# Altium PCB ANT_Miner_CtrlBoard_V1.2.PcbDoc
Units mil, origin at the board's own origin, x right, y up, seen from the top; angles counter-clockwise.
Board outline 5078.74 x 1377.95 mil, 2 copper layers (Top Layer, Bottom Layer); 116 components, 89 nets, 414 pads, 100 vias.
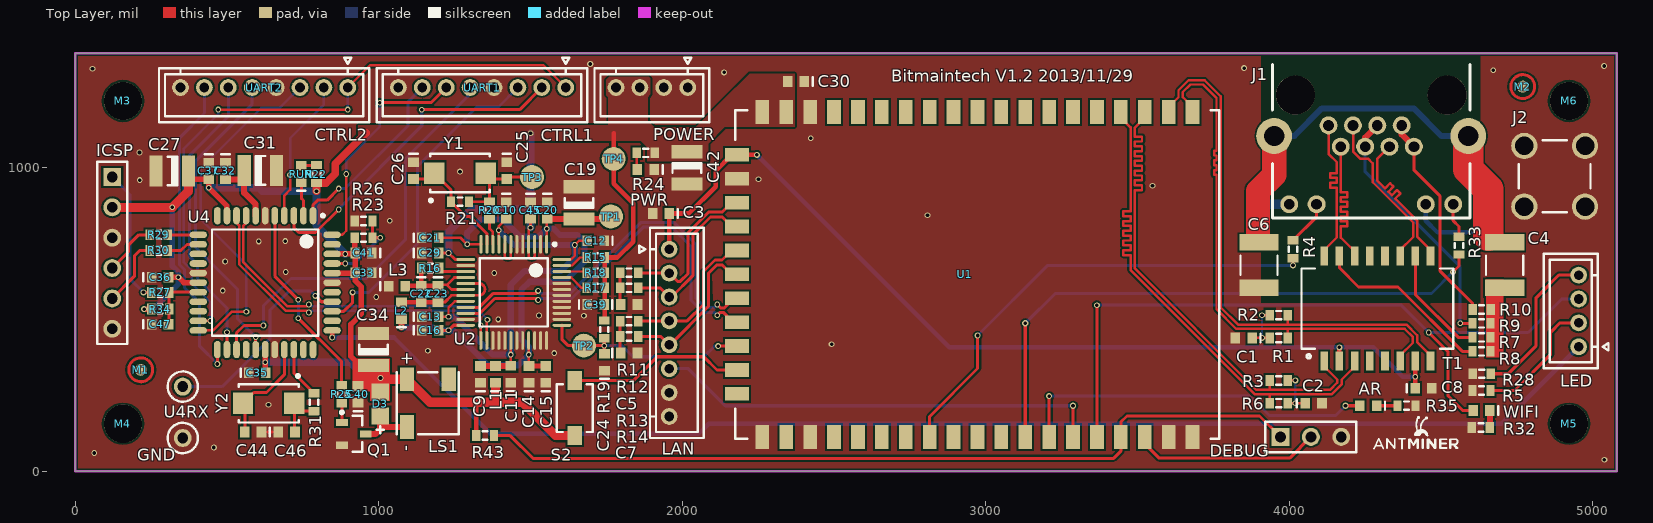
[diagram p0: Top Layer view]
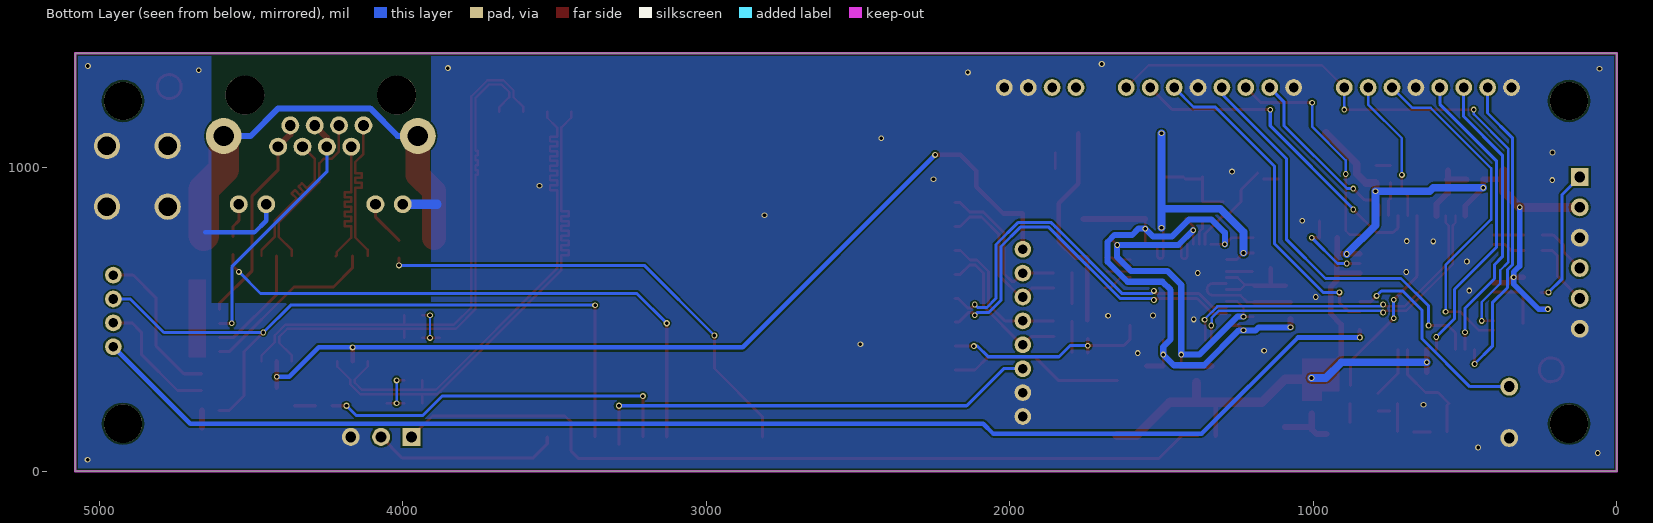
[diagram p1: Bottom Layer view, seen from below]

## Layer stack, top to bottom
Top Layer: signal copper 1.4
Dielectric: core 12.6, FR-4, Dk 4.8
Bottom Layer: signal copper 1.4

## Board outline
5078.74,1377.95 5078.74,0 0,0 0,1377.95

## Design rules (kind name [scope] priority, off if disabled: settings)
Clearance [All] p1: gap=6
DiffPairsRouting [All] p1: maxlimit=6 minlimit=6 mostfreqgap=6 maxuncoupledlength=500
HoleSize [All] p1: absolutevalues=TRUE maxlimit=200 minlimit=1 maxpercent=80.000 minpercent=20.000
MinimumSolderMaskSliver [All] p1: minsoldermaskwidth=1
PolygonConnect [All] p1: connectstyle=Direct reliefconductorwidth=10 reliefentries=4 polygonreliefangle="90 Angle" airgapwidth=10
RoutingVias [All] p1: holewidth=12 width=20 viastyle="Through Hole" minholewidth=12 minwidth=20 maxholewidth=28 maxwidth=50
SilkToSilkClearance [All] p1: silktosilkclearance=1
SilkToSolderMaskClearance SilkscreenOverComponentPads [IsPad] p1: minsilkscreentomaskgap=1 clearancetoexposedcopper=TRUE
SolderMaskExpansion [All] p1: expansion=4
Width Width_VDD [InNet('VDD')] p1: maxlimit=100 minlimit=10 preferedwidth=10
Width Width_GND [InNet('GND')] p2: maxlimit=100 minlimit=8 preferedwidth=15
Width Width_PLL [InNet('VPLL')] p3: maxlimit=50 minlimit=10 preferedwidth=10
Width Width_VCC [InNet('VCC')] p4: maxlimit=50 minlimit=10 preferedwidth=10
Width [All] p5: maxlimit=100 minlimit=8 preferedwidth=8
23 further rules are at their usual default settings.

## Classes and differential pairs
differential pair D1: +D1_P -D1_N
differential pair LAN1_RX: +LAN1_RX_P -LAN1_RX_N
differential pair LAN1_TX: +LAN1_TX_P -LAN1_TX_N
differential pair USB: +USB_P -USB_N
differential pair WAN_RX: +WAN_RX_P -WAN_RX_N
differential pair WAN_TX: +WAN_TX_P -WAN_TX_N
differential pair WANRX: +WANRX_P -WANRX_N
differential pair WANTX: +WANTX_P -WANTX_N

## Components (designator, comment, footprint, x,y, rotation, side; value= is the part's Value field where it differs from the comment)
AR "Green" LED0603(1608) 4259.84,216.54 r180 top
C1 "100nF" CC0603(1608) 3849.92,439.92 r180 top
C2 "100nF" CC0603(1608) 4079.92,224.92 r0 top
C3 "100nF" CC0603(1608) 1929.92,849.92 r180 top
C4 "10nF/2KV" 1812 4708.92,679.92 r270 top
C5 "100nF" CC0603(1608) 1824.92,549.92 r0 top
C6 "10nF/2KV" 1812 3899.92,679.92 r270 top
C7 "100nF" CC0603(1608) 1824.92,389.92 r0 top
C8 "100nF" CC0603(1608) 4441.92,273.92 r0 top
C9 "4.7uF" CC0603(1608) 1334.92,319.92 r90 top
C10 "100nF" CC0603(1608) 1419.92,859.92 r270 top
C11 "100nF" CC0603(1608) 1435.08,320.08 r90 top
C12 "100nF" CC0603(1608) 1714.92,759.92 r180 top
C13 "100nF" CC0603(1608) 1169.92,509.92 r0 top
C14 "4.7uF" CC0603(1608) 1494.92,319.92 r90 top
C15 "100nF" CC0603(1608) 1549.92,319.92 r90 top
C16 "100nF" CC0603(1608) 1169.92,464.92 r0 top
C19 "22uF/10V" CC1210(3225) 1659.92,884.92 r270 top
C20 "4.7uF" CC0603(1608) 1554.92,859.92 r270 top
C21 "100nF" CC0603(1608) 1169.92,769.92 r0 top
C22 "100nF" CC0603(1608) 1139.92,584.92 r270 top
C23 "100nF" CC0603(1608) 1194.92,584.92 r270 top
C24 "4.7uF" CC0603(1608) 1743.92,359.92 r90 top
C25 "22pF" CC0603(1608) 1421.34,990.98 r270 top
C26 "22pF" CC0603(1608) 1114.25,990.98 r270 top
C27 "22uF/10V" CC1210(3225) 319.92,989.92 r0 top
C29 "100nF" CC0603(1608) 1169.92,719.92 r0 top
C30 "100nF" CC0603(1608) 2374.92,1284.92 r180 top
C31 "10uF/10V" CC1210(3225) 609.88,991.93 r180 top
C32 "100nF" CC0603(1608) 494.92,989.92 r270 top
C33 "100nF" CC0603(1608) 949.92,654.92 r180 top
C34 "22uF/10V" CC1210(3225) 982.92,401.92 r270 top
C35 "100nF" CC0603(1608) 599.92,324.92 r0 top
C36 "100nF" CC0603(1608) 279.92,639.92 r0 top
C37 "100nF" CC0603(1608) 439.92,989.92 r270 top
C39 "100nF" CC0603(1608) 1714.92,549.92 r0 top
C40 "100nF" CC0603(1608) 931.92,253.92 r90 top
C41 "100nF" CC0603(1608) 949.92,719.92 r180 top
C42 "22uF/6.3V" CC1210(3225) 2014.92,999.92 r90 top
C44 "22pF" CC0603(1608) 586.26,129.72 r180 top
C45 "100nF" CC0603(1608) 1499.92,859.92 r270 top
C46 "22pF" CC0603(1608) 696.5,129.72 r0 top
C47 "100nF" CC0603(1608) 279.92,484.92 r0 top
D3 "1N4148" DIODE0805 1004.92,182.92 r180 top
DEBUG "HDR1X3" HDR1X3 3970.92,113.92 r0 top
GND "GND" TP_DIP_1.5mm 354.33,110.24 r0 top
ICSP "HDR1X6" HDR1X6 122.05,970.08 r270 top
J1 "WAN" RJ45_2LED_DIP 4269.69,1240.16 r180 top locked
J2 "SMA HOLE" SMA_HOLE 4874.02,972.44 r0 top
L1 "600/100M" INDC1608L 1384.92,319.92 r90 top
L2 "600/100M" INDC1608L 1074.92,529.92 r90 top
L3 "600/100M" INDC1608L 1059.92,609.92 r0 top
LAN "Header 8" 8PIN_180 1956.69,456.69 r270 top locked
LED "Header 4" 4PIN_180 4952.92,528.81 r90 top
LS1 "Bell" YR5025A 1161.92,224.92 r270 top
M1 "MASK" MASK 215.92,334.92 r0 top
M2 "MASK" MASK 4768.92,1267.92 r0 top
M3 "Mount Hole" HOLE_3.2#1 157.48,1220.47 r0 top locked
M4 "Mount Hole" HOLE_3.2#1 157.48,157.48 r0 top locked
M5 "Mount Hole" HOLE_3.2#2 4763.78,157.48 r0 top locked
M6 "Mount Hole" HOLE_3.2#2 4763.78,1220.47 r0 top locked
POWER "Header 4" 4PIN_180 1899.81,1264.92 r180 top locked
PWR "Red" LED0603(1608) 1879.92,994.92 r180 top
Q1 "MMBT3904" SOT23_L 917.92,123.92 r0 top
R1 "49.9ohm/1%" RR0603(1608) 3964.92,439.92 r0 top
R2 "49.9ohm/1%" RR0603(1608) 3964.92,514.92 r0 top
R3 "49.9ohm/1%" RR0603(1608) 3964.92,299.92 r180 top
R4 "270" RR0603(1608) 4011.92,731.92 r90 top
R5 "NC" RR0603(1608) 4632.92,266.92 r180 top
R6 "49.9ohm/1%" RR0603(1608) 3964.92,224.92 r180 top
R7 "75ohm/1%" RR0603(1608) 4632.92,441.92 r0 top
R8 "75ohm/1%" RR0603(1608) 4632.92,395.92 r0 top
R9 "75ohm/1%" RR0603(1608) 4632.92,487.92 r0 top
R10 "75ohm/1%" RR0603(1608) 4633.39,533.92 r0 top
R11 "49.9ohm/1%" RR0603(1608) 1824.92,654.92 r0 top
R12 "49.9ohm/1%" RR0603(1608) 1824.92,604.92 r0 top
R13 "49.9ohm/1%" RR0603(1608) 1824.92,494.92 r0 top
R14 "49.9ohm/1%" RR0603(1608) 1824.92,444.92 r0 top
R15 "10K" RR0603(1608) 1714.92,704.92 r180 top
R16 "2.43K/1%" RR0603(1608) 1169.92,669.92 r0 top
R17 "510" RR0603(1608) 1714.92,604.92 r0 top
R18 "10K" RR0603(1608) 1714.92,654.92 r0 top
R19 "10K" RR0603(1608) 1742.92,467.92 r90 top
R20 "0" RR0603(1608) 1364.92,859.92 r90 top
R21 "1M" RR0603(1608) 1267.8,888.62 r0 top
R22 "1K" RR0603(1608) 794.92,979.92 r270 top
R23 "0" RR0603(1608) 949.92,769.92 r180 top
R24 "1K" RR0603(1608) 1879.92,1049.92 r0 top
R25 "1K" RR0603(1608) 877.92,253.92 r90 top
R26 "NC" RR0603(1608) 949.92,824.92 r0 top
R27 "10" RR0603(1608) 279.92,589.92 r180 top
R28 "NC" RR0603(1608) 4633.92,321.92 r180 top
R29 "10" RR0603(1608) 275.59,779.53 r180 top
R30 "10" RR0603(1608) 275.59,728.35 r180 top
R31 "0" RR0603(1608) 787.05,228.15 r90 top
R32 "1K" RR0603(1608) 4630.95,144.89 r0 top
R33 "270" RR0603(1608) 4559.06,744.09 r90 top
R34 "4.7K" RR0603(1608) 279.92,534.92 r180 top
R35 "1K" RR0603(1608) 4385.83,216.54 r180 top
R43 "4.7K" RR0603(1608) 1350.39,118.11 r180 top
RUN "Green" LED0603(1608) 744.92,979.92 r90 top
S2 "SW-PB" SWITCH_3x4 1645.67,208.66 r0 top
T1 "PM44-11BP" PM44-11BP 4289.92,536.69 r0 top locked
TP1 "TP" TP2 1764.92,839.92 r180 top
TP2 "TP" TP2 1675.92,414.44 r180 top
TP3 "TP" TP2 1504.92,969.92 r270 top
TP4 "TP" TP2 1773.92,1029.92 r0 top
U1 "AR9331_49PIN" AR9331_49PIN 2263.78,107.95 r0 top locked
U2 "μPD720114" TQFP48_L 1444.92,589.92 r270 top locked
U4 "PIC32MX250F128D" TQFP44_L 625.98,622.05 r270 top locked
U4RX "RX" TP_DIP_1.5mm 354.33,279.53 r0 top
UART1 "CTRL1" 8PIN_180 1340.33,1264.92 r180 top locked
UART2 "CTRL2" 8PIN_180 622.51,1264.92 r180 top locked
WIFI "Green" LED0603(1608) 4632.92,200.92 r180 top
Y1 "30MHz" 4SMX 1267.8,983.11 r0 top
Y2 "8M" 4SMX 637.44,224.21 r180 top

## Footprints (in the part's own frame and the unit in brackets; to place one, negate y for a bottom-side part, rotate by r counter-clockwise, add the part's x,y. Pads: shape width x height; smd on the part's side, far side on the other; paste and mask are expansions set on the pad)
4PIN_180 [mm]
  round 1.4 hole 0.8: 1(-3,0) 2(-1,0) 3(1,0) 4(3,0)
  silkscreen extent -4.8,-2.5 4.8,2.9, body extent -5,-1.8 5,3, height 6.1
4SMX [mm]
  rect 1.7x1.8 smd: 1(-2.15,0) 2(2.15,0)
  silkscreen extent -2.57,-2.42 2.5,1.6
8PIN_180 [mm]
  round 1.4 hole 0.8: 1(-7,0) 2(-5,0) 3(-3,0) 4(-1,0) 5(1,0) 6(3,0) 7(5,0) 8(7,0)
  silkscreen extent -8.8,-2.5 8.8,2.9, body extent -9,-1.8 9,3, height 6.1
1812 [mm] "Chip Capacitor, Body 4.5x3.2mm, IPC High Density"
  rect 1.4x3.3 smd: 1(-1.9,0) 2(1.9,0)
  silkscreen extent -0.8,-1.55 0.8,1.55, body extent -2.4,-1.7 2.4,1.7, height 1.4
AR9331_49PIN [mm] "AR9331 49PIN"
  rect 1.143x2 smd: 1(0,0.158) 2(2,0.158) 3(4,0.158) 4(6,0.158) 5(8,0.158) 6(10,0.158) 7(12,0.158) 8(14,0.158) 9(16,0.158) 10(18,0.158) 11(20,0.158) 12(22,0.158) 13(24,0.158) 14(26,0.158) 15(28,0.158) 16(30,0.158) 17(32,0.158) 18(34,0.158) 19(36,0.158) 20(36,27.341) 21(34,27.341) 22(32,27.341) 23(30,27.341) 24(28,27.341) 25(26,27.341) 26(24,27.341) 27(22,27.341) 28(20,27.341) 29(18,27.341) 30(16,27.341) 31(14,27.341) 32(12,27.341) 33(10,27.341) 34(8,27.341) 35(6,27.341) 36(4,27.341) 37(2,27.341) 38(0,27.341)
  rect 2x1.146 smd: 39(-2.11,23.75) 40(-2.11,21.75) 41(-2.11,19.75) 42(-2.11,17.75) 43(-2.11,15.75) 44(-2.11,13.75) 45(-2.11,11.75) 46(-2.11,9.75) 47(-2.11,7.75) 48(-2.11,5.75) 49(-2.11,3.75)
  silkscreen extent -2.25,0 38.25,27.5
CC0603(1608) [mm] "Chip Capacitor, Body 1.6x0.8mm, IPC High Density"
  rect 0.8x0.9 smd: 1(-0.7,0) 2(0.7,0)
  silkscreen extent -1.4,-0.35 -1.4,0.35, body extent -0.87,-0.48 0.87,0.47, height 0.85
CC1210(3225) [mm] "Chip Capacitor, Body 3.2x2.5mm, IPC High Density"
  rect 1.1x2.6 smd: 1(-1.35,0) 2(1.35,0)
  silkscreen extent -0.4,-1.2 0.42,1.2, body extent -1.7,-1.35 1.7,1.35, height 1.35
DIODE0805 [mm]
  rect 1.5x1.4 smd: 1(0,0) 2(0,-2)
  silkscreen extent -0.28,0.88 0.28,1.44, body extent -0.7,-2.07 0.7,0.07, height 0.7
HDR1X3 [mm] "Connector; Header; 3 Position"
  rect 1.5x1.5 hole 0.9: 1(0,0)
  round 1.5 hole 0.9: 2(2.54,0) 3(5.08,0)
  silkscreen extent -1.27,-1.27 6.35,1.27
HDR1X6 [mm] "Connector; Header; 6 Position"
  rect 1.5x1.5 hole 0.9: 1(0,0)
  round 1.5 hole 0.9: 2(2.54,0) 3(5.08,0) 4(7.62,0) 5(10.16,0) 6(12.7,0)
  silkscreen extent -1.27,-1.27 13.97,1.27
HOLE_3.2#1 [mm]
  round 3.2 hole 3.2 unplated: 0(0,0)
HOLE_3.2#2 [mm]
  round 3.2 hole 3.2 unplated: 0(4,0)
INDC1608L [mm] "Chip Inductor, Body 1.6x0.8mm, IPC High Density"
  rect 0.8x0.9 smd: 1(-0.7,0) 2(0.7,0)
  silkscreen extent -1.4,-0.35 -1.4,0.35, body extent -0.87,-0.48 0.87,0.48, height 0.55
LED0603(1608) [mm] "Chip LED, Body 1.6x0.8mm, IPC High Density"
  rect 0.8x0.9 smd: 1(0.7,0) 2(-0.7,0)
  silkscreen extent -1.4,-0.35 -1.4,0.35, body extent -0.87,-0.48 0.87,0.47, height 0.85
MASK [mm] "SMD MASK 1mm"
  round 1 smd: 0(0,0)
  Top Layer circle w0.254: c0,0 r1
PM44-11BP [mm]
  rect 0.64x1.6 smd: 1(-4.445,-4.4) 2(-3.175,-4.4) 3(-1.905,-4.4) 4(-0.635,-4.4) 5(0.635,-4.4) 6(1.905,-4.4) 7(3.175,-4.4) 8(4.445,-4.4) 9(4.445,4.4) 10(3.175,4.4) 11(1.905,4.4) 12(0.635,4.4) 13(-0.635,4.4) 14(-1.905,4.4) 15(-3.175,4.4) 16(-4.445,4.4)
  silkscreen extent -6.35,-4.15 6.35,3.35
RJ45_2LED_DIP [mm]
  round 1.5 hole 0.9: 1(3.57,2.54) 2(2.55,4.32) 3(1.53,2.54) 4(0.51,4.32) 5(-0.51,2.54) 6(-1.53,4.32) 7(-2.55,2.54) 8(-3.57,4.32) 9(6.86,9.14) 10(4.57,9.14) 11(-4.57,9.14) 12(-6.86,9.14)
  round 3 hole 1.7: 13(8.125,3.43) 14(-8.125,3.43)
  round 3.25 hole 3.25: ""(-6.35,0) ""(6.35,0)
  silkscreen extent -8.26,-2.54 8.26,10.29
RR0603(1608) [mm] "Chip Resistor, Body 1.6x0.8mm, IPC High Density"
  rect 0.7x0.9 smd: 1(-0.75,0) 2(0.75,0)
  silkscreen extent -0.2,-0.35 0.2,0.35, body extent -0.85,-0.48 0.85,0.47, height 0.6
SMA_HOLE [mm] "SMA Socket Assembly Hole."
  round 2.2 hole 1.55: 1(-2.54,2.54) 2(2.54,2.54) 3(-2.54,-2.54) 4(2.54,-2.54)
  silkscreen extent -3,-3 3,3
SOT23_L [mm] "SOT23, 3-Leads, Body 2.9x1.3mm, Pitch 0.95mm, Lead Span 2.3mm - Reverse Pinning, IPC High Density"
  rect 1x0.6 smd: 1(-1,0.95) 2(-1,-0.95) 3(1,0)
  silkscreen extent -1.12,-1.5 0.7,1.92, body extent -0.7,-1.5 0.7,1.5, height 1.1
SWITCH_3x4 [mm]
  rect 1.2x1.6 smd: 1(0,2.3) 2(0,-2.3)
  silkscreen extent -1.5,-2 1.5,2
TP2 [mm] "Test Point 2mm SMD"
  round 2 smd: 1(0,0)
TP_DIP_1.5mm [mm]
  round 1.5 hole 0.9: 1(0,0)
  silkscreen extent -1.27,-1.27 1.27,1.27
TQFP44_L [mm] "Thin QFP, 44-Leads, Body 10x10mm, Pitch 0.8mm, IPC High Density"
  oval 1.45x0.55 smd: 1(-5.6,4) 2(-5.6,3.2) 3(-5.6,2.4) 4(-5.6,1.6) 5(-5.6,0.8) 6(-5.6,0) 7(-5.6,-0.8) 8(-5.6,-1.6) 9(-5.6,-2.4) 10(-5.6,-3.2) 11(-5.6,-4) 23(5.6,-4) 24(5.6,-3.2) 25(5.6,-2.4) 26(5.6,-1.6) 27(5.6,-0.8) 28(5.6,0) 29(5.6,0.8) 30(5.6,1.6) 31(5.6,2.4) 32(5.6,3.2) 33(5.6,4)
  oval 0.55x1.45 smd: 12(-4,-5.6) 13(-3.2,-5.6) 14(-2.4,-5.6) 15(-1.6,-5.6) 16(-0.8,-5.6) 17(0,-5.6) 18(0.8,-5.6) 19(1.6,-5.6) 20(2.4,-5.6) 21(3.2,-5.6) 22(4,-5.6) 34(4,5.6) 35(3.2,5.6) 36(2.4,5.6) 37(1.6,5.6) 38(0.8,5.6) 39(0,5.6) 40(-0.8,5.6) 41(-1.6,5.6) 42(-2.4,5.6) 43(-3.2,5.6) 44(-4,5.6)
  silkscreen extent -5.72,-4.45 4.45,4.95, body extent -5,-5 5,5, height 1.6
TQFP48_L [mm]
  oval 1.55x0.25 smd: 1(-4.025,2.75) 2(-4.025,2.25) 3(-4.025,1.75) 4(-4.025,1.25) 5(-4.025,0.75) 6(-4.025,0.25) 7(-4.025,-0.25) 8(-4.025,-0.75) 9(-4.025,-1.25) 10(-4.025,-1.75) 11(-4.025,-2.25) 12(-4.025,-2.75) 25(4.025,-2.75) 26(4.025,-2.25) 27(4.025,-1.75) 28(4.025,-1.25) 29(4.025,-0.75) 30(4.025,-0.25) 31(4.025,0.25) 32(4.025,0.75) 33(4.025,1.25) 34(4.025,1.75) 35(4.025,2.25) 36(4.025,2.75)
  oval 0.25x1.55 smd: 13(-2.75,-4.025) 14(-2.25,-4.025) 15(-1.75,-4.025) 16(-1.25,-4.025) 17(-0.75,-4.025) 18(-0.25,-4.025) 19(0.25,-4.025) 20(0.75,-4.025) 21(1.25,-4.025) 22(1.75,-4.025) 23(2.25,-4.025) 24(2.75,-4.025) 37(2.75,4.025) 38(2.25,4.025) 39(1.75,4.025) 40(1.25,4.025) 41(0.75,4.025) 42(0.25,4.025) 43(-0.25,4.025) 44(-0.75,4.025) 45(-1.25,4.025) 46(-1.75,4.025) 47(-2.25,4.025) 48(-2.75,4.025)
  silkscreen extent -4.15,-2.85 2.85,3.55, body extent -3.5,-3.5 3.5,3.5, height 1.6
YR5025A [mm]
  rect 2x1.2 smd: 1(-2,-1.75) 2(2,-1.75) ""(-2,1.75)
  silkscreen extent -2.6,-2.6 2.6,2.6

## Part data
AR PWR RUN WIFI: library part LED0, "Typical INFRARED GaAs LED"
C1 C2 C3 C4 C5 C6 C7 C8 C9 C10 C11 C12 C13 C14 C15 C16 C19 C20 C21 C22 C23 C24 C25 C26 C27 C29 C30 C31 C32 C33 C34 C35 C36 C37 C39 C40 C41 C42 C44 C45 C46 C47: library part "Cap Semi", "Capacitor (Semiconductor SIM Model)"
D3: library part "Diode 1N4148", "High Conductance Fast Diode"
DEBUG: library part "Header 3", "Header, 3-Pin"
GND U4RX: library part TP
ICSP: library part "Header 6", "Header, 6-Pin"
J1: library part RJ45-DIP, "RJ45,DUAL LED,DIP"
J2: library part SMA_HOLE, "SMA Socket Assembly Hole."
L1 L2 L3: library part Inductor, "Inductor"
LAN: "Header, 8-Pin"
LED POWER: "Header, 4-Pin"
LS1: "Electrical Bell"
M3 M4 M5 M6: library part M_Hole
Q1: "NPN Switching Transistor"
R1 R2 R3 R4 R5 R6 R7 R8 R9 R10 R11 R12 R13 R14 R15 R16 R17 R18 R19 R20 R21 R22 R23 R24 R25 R26 R27 R28 R29 R30 R31 R32 R33 R34 R35 R43: library part Res1, "Resistor"
S2: "Switch"
TP1 TP2 TP3 TP4: library part TP2
U2: library part uPD720114
UART1 UART2: library part "Header 8", "Header, 8-Pin"
Y1 Y2: library part XTAL, "Crystal Oscillator"

## Via types
v1: diameter 19, hole 12, Top Layer to Bottom Layer, 87 vias
v2: diameter 20, hole 12, Top Layer to Bottom Layer, 13 vias

## Nets (pads, with @x,y where several pads share a name; then routed paths per layer and width w, separated by ;. In a path a pad name is that pad's centre, name@x,y a point inside that pad or via, vN(x,y) a via of type N, cw(c..) or ccw(c..) an arc to the next point about the centre after c; other vN are vias at no path point)
AR9331_LED: AR.1 U1.13 | length 1196.6
  Top Layer w10: U1.13 v2(3208.66,248.03) ; v2(4185.04,216.54) AR.1
  Bottom Layer w10: v2(3208.66,248.03) 3870.08,248.03 3933.07,185.04 4153.54,185.04 v2(4185.04,216.54)
AR9331_RX: DEBUG.1 R43.1 U1.16 | length 2764.6
  Top Layer w10: R43.1 1433.07,118.11 1507.87,43.31 3421.26,43.31 3444.89,66.94 U1.16 3444.89,162.89 3464.92,182.92 3901.92,182.92 DEBUG.1
AR9331_TX: DEBUG.2 U1.17 | length 618.8
  Top Layer w10: U1.17 3523.63,91.21 3570.92,43.92 4000.92,43.92 DEBUG.2
BEEP: R25.2 U4.5 | length 650.4
  Top Layer w10: U4.5 657.48,643.36 v1(734.92,565.92) ; v1(734.92,504.92) 877.92,361.92 R25.2
  Bottom Layer w10: v1(734.92,504.92) v1(734.92,565.92)
D1_N: U2.25 U4.9 | length 1110.7
  Top Layer w8: U4.9 531.5,819.35 540.24,810.6 540.24,682.6 692.92,529.92 763.92,529.92 v2(769.92,523.92) ; v1@1334.92,479.92 1336.65,478.19 U2.25
  Bottom Layer w8: v2@769.92,524.92 774.92,529.92 1310.12,529.92 1334.92,505.12 v1@1334.92,479.92
  other v1: 1335.92,480.92
D1_P: U2.26 U4.8 | length 1115.7
  Top Layer w8: U4.8 562.99,818.99 554.24,810.24 554.24,688.6 698.92,543.92 763.92,543.92 v2(769.92,549.92) ; U2.26 v1@1356.34,497.92
  Bottom Layer w8: v2(769.92,549.92) 775.92,543.92 1315.92,543.92 1354.92,504.92 v1@1354.92,494.92
  other v1: 1357.92,499.92
FAN1_SPEED: U4.3 UART1.2 | length 1093
  Top Layer w10: U4.3 720.47,803.37 736.92,786.92 791.92,786.92 v1(867.92,862.92) ; v1(1141.73,1191.92) 1464.18,1191.92 UART1.2
  Bottom Layer w10: v1(867.92,862.92) 867.92,864.92 1141.73,1138.73 v1(1141.73,1191.92)
FAN2_SPEED: U4.4 UART2.2 | length 476.4
  Top Layer w8: U4.4 688.98,908.98 707.92,927.92 v1(707.92,976.92)
  Bottom Layer w8: v1(707.92,976.92) 707.92,1097.92 819.36,1209.36 UART2.2
FAN_PWM: U4.21 UART1.1 UART2.1 | length 2097.3
  Top Layer w8: U4.21 v1(444.96,496.06) ; v1(471.1,1192.1) v1(898.1,1192.1) ; UART2.1 972.1,1338.92 1541.92,1338.92 UART1.1
  Bottom Layer w8: v1(444.96,496.06) 444.96,558.04 384,619 384,662.84 358,688.84 358,1064 471.1,1177.1 v1(471.1,1192.1) ; v1(898.1,1192.1) UART2.1
GND: C1.2 C2.2 C3.2 C5.2 C6.2 C7.2 C8.2 C9.1 C10.1 C11.1 C12.1 C13.1 C14.1 C15.1 C16.1 C19.1 C20.1 C21.1 C24.1 C25.1 C26.1 C27.1 C29.1 C30.1 C31.1 C32.1 C33.1 C34.1 C35.1 C36.1 C37.1 C39.1 C40.1 C41.1 C42.1 C44.1 C45.1 C46.1 C47.1 DEBUG.3 GND.1 ICSP.3 ICSP.6 J1.9 J1.11 J2.1 J2.2 J2.3 J2.4 L3.1 LAN.7 LAN.8 POWER.1 POWER.2 PWR.2 Q1.2 R5.2 R26.1 R28.2 R32.1 R35.1 U1.1 U1.3 U1.18 U1.19 U1.36 U1.40 U2.2 U2.5 U2.6 U2.14 U2.23 U2.27 U2.28 U2.29 U2.31 U2.32 U2.34 U2.35 U2.36 U2.38 U2.39 U2.40 U2.41 U2.42 U2.43 U2.44 U4.6 U4.16 U4.29 U4.39 UART1.4 UART1.8 UART2.4 UART2.8 | length 438.5
  Top Layer w9: C44.1 C46.1
  Bottom Layer w15: J1.11 4449.61,825.98 4488.19,787.4 4649.61,787.4
  Bottom Layer w30: 3886.53,880.32 J1.9
  other v1: 5037.92,38.92 62.92,60.92 636.92,219.92 1577.92,389.92 1161.92,397.92 2491.92,418.92 1393.92,500.92 1675.92,512.92 1527.92,513.92 991.92,574.92 485.92,595.92 1380.92,653.92 693.92,656.92 493.92,691.92 604.92,757.92 691.92,758.92 1035.92,825.92 2807.92,843.92 3548.92,940.92 212.92,959.92 2250.92,962.92 1267.92,987.92 211.92,1050.92 2422.92,1097.92 4671.92,1321.92 56.92,1326.92 3850.92,1328.92 5036.92,1335.92
  other v2: 456.69,78.74 2137.8,1314.96 1696.85,1342.52
HUB_CLK: C25.2 R20.2 R21.2 TP3.1 Y1.2 | length 274.3
  Top Layer w9: R21.2 R20.2@1364.09,888.62 ; R20.2 Y1.2@1364.92,970.63 ; Y1.2@1372.13,963.43 C25.2 ; C25.2@1427.83,969.92 TP3.1
HUB_RST: C24.2 R19.1 TP2.1 U1.47 U2.37 | length 709.6
  Top Layer w10: U2.37 1603.39,435.46 1624.41,414.44 v1(1742.92,414.44) ; C24.2@1742.92,390.48 R19.1 ; v1(2118.07,413.07) U1.47
  Bottom Layer w10: v1(1742.92,414.44) 1801.41,414.44 1837.92,377.92 2070.92,377.92 2105.92,412.92 v1@2117.92,412.92
LAN1_LED: LAN.6 U1.14 | length 1508.4
  Top Layer w10: U1.14@3287.4,89.4 U1.14 v2(3287.4,216.54)
  Bottom Layer w10: LAN.6 2019.69,338.58 2141.73,216.54 v2(3287.4,216.54)
LAN1_RX_N: LAN.3 R12.2 U1.42 | length 539.9
  Top Layer w10: R12.2 1926.57,604.92 LAN.3 1964.8,574.8 2034.92,644.92 2034.92,779.92 2093.14,838.14 2131.7,838.14 2163.07,806.77 U1.42
LAN1_RX_P: LAN.2 R11.2 U1.41 | length 522.7
  Top Layer w10: R11.2@1855.83,653.54 LAN.2 1984,626.24 1993.61,626.24 2018.92,651.55 2018.92,786.55 2086.52,854.14 2131.14,854.14 2162.51,885.51 U1.41
LAN1_TX_N: LAN.5 R14.2 U1.44 | length 523.6
  Top Layer w10: R14.2 1929.09,444.92 LAN.5 1959.95,417.32 2085.92,543.29 2085.92,652.29 2114.29,680.66 2131.18,680.66 2162.55,649.29 U1.44
LAN1_TX_P: LAN.4 R13.2 U1.43 | length 485.1
  Top Layer w10: R13.2@1855.59,496.06 LAN.4 2016.06,496.06 2069.92,549.92 2069.92,658.92 2107.66,696.66 2130.66,696.66 2162.03,728.03 U1.43
LED: RUN.2 U4.2 | length 112.8
  Top Layer w10: RUN.2 744.92,899.92 751.97,892.87 U4.2
LED2: LED.1 U4.34 | length 4379.1
  Top Layer w15: v1(846.46,441.39) U4.34
  Bottom Layer w15: v1(846.46,441.39) 1050.46,441.39 1366.92,124.92 2054.92,124.92 2087.48,157.48 4699.7,157.48 LED.1
NET_POW: C3.1 C8.1 LAN.1 T1.2 T1.7 U1.39 | length 3119.9
  Top Layer w15: LAN.1 C3.1@1956.69,849.13 ; C3.1 2021.92,849.92 2109.92,937.92 2109.92,989.92 2162.99,1042.99 U1.39 v1(2245.85,1042.99) ; T1.2 v2(4164.92,408.92) ; C8.1@4414.92,276.48 v1(4414.92,311.92) T1.7
  Bottom Layer w15: v1@2245.92,1042.92 2879.92,408.92 v2(4164.92,408.92) 4276.92,408.92 4373.92,311.92 v1(4414.92,311.92)
NetAR_2: AR.2 R35.2 | length 68.9
  Top Layer w10: AR.2 R35.2
NetC1_1: C1.1 R1.1 R2.1 | length 159.8
  Top Layer w8: C1.1 3906.44,439.92 R1.1 ; v1(3909.92,514.92) R2.1
  Bottom Layer w8: v1@3906.44,511.44 v1(3909.92,514.92) ; v1(3909.92,439.92) v1@3909.92,511.44
NetC2_1: C2.1 R3.1 R6.1 | length 158.4
  Top Layer w8: R6.1 C2.1 ; R3.1 v1(4019.92,299.92)
  Bottom Layer w8: v1(4019.92,224.92) v1(4019.92,299.92)
NetC4_1: C4.1 C6.1 J1.13 J1.14 | length 1427.4
  Top Layer w80: C6.1@3896.92,769.92 3896.92,923.92 3949.8,976.8 J1.13
  Top Layer w100: J1.14 4589.57,995.28 4654.92,929.92 C4.1@4654.92,776.92
  Bottom Layer w20: J1.13 4016.12,1105.12 4106.92,1195.92 4409.92,1195.92 4500.72,1105.12 J1.14
NetC4_2: C4.2 R7.2 R8.2 R9.2 R10.2
NetC5_1: C5.1 R11.1 R12.1 | length 108
  Top Layer w10: C5.1@1795.39,551.89 R12.1 ; R12.1@1795.39,599.92 R11.1
NetC7_1: C7.1 R13.1 R14.1 | length 103
  Top Layer w10: C7.1@1795.39,391.89 R14.1 R13.1
NetC22_1: C22.1 C23.1 L3.2 R16.1 U2.16 U2.18 | length 328.8
  Top Layer w9: C23.1@1197.36,614.92 1224.92,614.92 ; U2.18 1240.08,599.76 1224.92,614.92 ; U2.16 1249.13,639.13 1224.92,614.92
  Top Layer w15: L3.2@1090.04,612.48 C22.1 ; R16.1@1139.92,669.45 C22.1 ; C23.1 C22.1
NetC22_2: C22.2 C23.2 L2.2 U2.17 U2.19 | length 370.3
  Top Layer w9: C23.2 1217.36,557.36 1240.08,580.08 U2.19 1330.08,580.08 ccw(c1330.08,599.92) 1349.92,599.92 ccw(c1330.39,599.92) 1330.39,619.45 U2.17
  Top Layer w15: L2.2@1074.92,557.36 C22.2 C23.2
NetC26_2: C26.2 R21.1 U2.11 Y1.1 | length 363.3
  Top Layer w10: C26.2 Y1.1@1163.46,963.43 ; Y1.1 1238.27,927.99 R21.1 1286.97,839.92 1299.92,839.92 1356.34,783.5 U2.11
NetC44_2: C44.2 U4.30 Y2.2 | length 346.6
  Top Layer w10: Y2.2 588.5,259.92 629.92,259.92 688.98,318.98 U4.30 ; C44.2 Y2.2@558.7,218.31
NetC46_2: C46.2 R31.1 Y2.1 | length 131.9
  Top Layer w10: C46.2@722.09,131.69 Y2.1 ; Y2.1@747.68,198.62 R31.1
NetD3_1: D3.1 LS1.2 Q1.3 | length 193.9
  Top Layer w20: Q1.3 989.92,123.92 1004.92,138.92 D3.1@1004.92,190.92 ; 1004.92,146.18 LS1.2
NetICSP_1: ICSP.1 R27.2 | length 448.2
  Top Layer w10: v1(224.92,589.92) R27.2
  Bottom Layer w10: ICSP.1 179.92,912.2 179.92,634.92 v1(224.92,589.92)
NetICSP_4: ICSP.4 R29.2 | length 182.2
  Top Layer w10: ICSP.4 174.92,722.95 174.92,744.92 209.53,779.53 R29.2
NetICSP_5: ICSP.5 R30.2 | length 228.8
  Top Layer w10: ICSP.5 194.92,642.95 194.92,709.92 213.35,728.35 R30.2
NetJ1_4: J1.4 J1.5 R9.1 | length 839.3
  Top Layer w10: v1(4562.63,487.92) R9.1
  Top Layer w20: J1.4 4249.61,1100 J1.5
  Bottom Layer w10: J1.4 4249.61,987.28 4562.63,674.25 v1(4562.63,487.92)
NetJ1_7: J1.7 J1.8 R10.1 | length 703.1
  Top Layer w10: J1.8 4410.24,993.61 4495.92,907.92 4495.92,661.56 4603.87,553.61 R10.1
  Top Layer w20: J1.7 4370.08,1110.24 J1.8
NetJ1_10: J1.10 R4.2 | length 151.1
  Top Layer w10: R4.2 4089.76,839.29 J1.10
NetJ1_12: J1.12 R33.2 | length 114.7
  Top Layer w10: J1.12 4539.76,826.38 4559.06,807.09 R33.2
NetLED_2: LED.2 R5.1 | length 425.4
  Top Layer w10: R5.1 4741.92,266.92 4860.92,385.92 4860.92,458.92 4891.44,489.44 LED.2
NetLED_4: LED.4 R28.1 | length 516.6
  Top Layer w10: R28.1 4720.92,321.92 4811.92,412.92 4811.92,570.92 4887.92,646.92 LED.4
NetPWR_1: PWR.1 R24.1 | length 53
  Top Layer w8: PWR.1@1850.39,996.89 R24.1
NetQ1_1: Q1.1 R25.1 | length 63.1
  Top Layer w10: Q1.1 R25.1@878.55,224.39
NetR7_1: R7.1 T1.10 | length 373.9
  Top Layer w10: T1.10 4414.92,582.92 4555.92,441.92 R7.1
NetR8_1: R8.1 T1.15 | length 591.4
  Top Layer w10: T1.15 4164.92,670.92 4227.92,607.92 4357.92,607.92 4569.92,395.92 R8.1
NetR15_2: R15.2 U2.47 | length 93
  Top Layer w8: U2.47 1636.97,678.5 1663.39,704.92 R15.2
NetR16_2: R16.2 U2.15 | length 85.9
  Top Layer w9: R16.2@1200.55,658.82 U2.15
NetR17_1: R17.1 U2.45 | length 96.2
  Top Layer w8: U2.45 1634.37,639.13 1668.58,604.92 R17.1
NetR18_1: R18.1 U2.46 | length 76.8
  Top Layer w8: U2.46 R18.1@1680.16,658.82
NetR20_1: R20.1 U2.10 | length 86.6
  Top Layer w9: R20.1 1364.92,799.92 1376.02,788.82 U2.10
NetR22_1: R22.1 RUN.1 | length 48
  Top Layer w10: RUN.1 R22.1@792.95,1007.48
NetR31_2: R31.2 U4.31 | length 171.5
  Top Layer w10: U4.31 720.47,324.25 R31.2
NetR32_2: R32.2 WIFI.2 | length 56
  Top Layer w20: R32.2 WIFI.2
NetS2_1: S2.1 U1.48 | length 585.7
  Top Layer w10: S2.1 1838.58,299.21 1917.32,377.95 2070.87,377.95 2114.49,334.33 U1.48
NetU2_7: U2.7 U2.8 | length 106.9
  Top Layer w8: U2.8 1415.39,709.92 ccw(c1424.39,709.92) 1424.39,700.92 1426.08,700.92 ccw(c1426.08,709.92) 1435.08,709.92 U2.7
PGEC: R30.1 U4.13 | length 108.5
  Top Layer w10: R30.1 348.35,728.35 368.03,748.03 U4.13
PGED: R29.1 U4.12 | length 100.4
  Top Layer w10: R29.1 U4.12
PIC_RESET: C47.2 R27.1 R34.1 U4.18 | length 199.4
  Top Layer w10: C47.2@309.45,486.89 R34.1 R27.1 310.08,590.55 U4.18
TEMP_SCL1: U4.44 UART1.6 | length 759
  Top Layer w8: U4.44 879.53,779.53 892.92,792.92 v1(892.92,979.92)
  Top Layer w10: v1(1003.92,1214.92) 1172.22,1214.92 UART1.6
  Bottom Layer w8: v1(892.92,979.92) 892.92,1024.92 1003.92,1135.92 v1(1003.92,1214.92)
TEMP_SCL2: U4.24 UART2.6 | length 967.1
  Top Layer w10: U4.24 v1(500,459)
  Bottom Layer w10: v1(500,459) 500,538 403,635 403,681 377,707 377,1042 504.4,1169.4 UART2.6
TEMP_SDA1: U4.1 UART1.7 | length 602
  Top Layer w10: U4.1 783.46,878.46 798.92,893.92 829.92,893.92 v1(867.92,931.92)
  Bottom Layer w10: v1(867.92,931.92) 888.92,931.92 1096.92,1139.92 1096.92,1218.36 UART1.7
TEMP_SDA2: U4.23 UART2.7 | length 1044.7
  Top Layer w10: v1(468.5,354) U4.23
  Bottom Layer w10: UART2.7 425.66,1180.66 343,1098 343,682.13 360.42,664.71 360.42,605.58 410,556 410,412.5 v1(468.5,354)
U1RX: U4.36 UART1.3 | length 1086.6
  Top Layer w10: U4.36 884.56,527.56 913.92,556.92 v1(913.92,589.92)
  Bottom Layer w10: v1(913.92,589.92) 967.78,589.92 1127.92,750.06 1127.92,1005.92 1322.92,1200.92 1394.44,1200.92 UART1.3
U1TX: U4.25 UART1.5 | length 1365.5
  Top Layer w10: U4.25 531.5,456.5 555.92,480.92 v2(619.92,480.92)
  Bottom Layer w10: v2(619.92,480.92) 619.92,545.12 710.72,635.92 959.92,635.92 1088.92,764.92 1088.92,1030.92 1300.96,1242.96 UART1.5
U2RX: U4.22 UART2.3 | length 1155.8
  Top Layer w8: U4.22 453.57,464.57 514.92,525.92 v1(563.92,525.92)
  Bottom Layer w8: v1(563.92,525.92) 563.92,679.92 414,829.84 414,999 612.92,1197.92 673.62,1197.92 UART2.3
U2TX: U4.27 UART2.5 | length 1022.4
  Top Layer w10: U4.27 v1@594.49,442.92
  Bottom Layer w10: UART2.5 583.14,1210.14 397,1024 397,737.84 534.92,599.92 534.92,502.92 v1(594.92,442.92)
U3RX: U4.43
U3TX: U4.38
U4RX: U4.37 U4RX.1 | length 692.6
  Top Layer w10: v2(791.34,578.74) 811.02,559.06 U4.37
  Bottom Layer w10: U4RX.1 484.25,279.53 641.73,437.01 641.73,531.5 704.72,594.49 775.59,594.49 v2(791.34,578.74)
U4TX: U4.33
USB_ID: R23.1 R26.2 U4.41 | length 274.1
  Top Layer w10: U4.41 v1(889.8,685.04) ; R26.2 R23.1 v1(1004.92,769.92)
  Bottom Layer w10: v1(889.8,685.04) 920.04,685.04 v1(1004.92,769.92)
USB_N: U1.45 U2.21 | length 1264.9
  Top Layer w10: U2.21 1330.71,540.71 1375.92,585.92 1515.92,585.92 v1(1524.92,594.92) ; v1(2114.92,549.92) 2125.66,539.18 2139.18,539.18 2170.55,570.55 U1.45
  Bottom Layer w8: 1849.92,804.92 1854.02,809.02
  Bottom Layer w10: v1(1524.92,594.92) 1533.92,585.92 1629.51,585.92 1849.51,805.92 1864.51,820.92 1971.55,820.92 2044.92,747.55 2044.92,570.42 2074.92,540.42 2105.42,540.42 v1(2114.92,549.92)
USB_P: U1.46 U2.22 | length 1256.3
  Top Layer w10: U2.22 1333.65,521.02 1382.55,569.92 1519.92,569.92 v1(1524.92,564.92) ; v1(2114.92,514.92) 2123.18,523.18 2136.66,523.18 2168.03,491.81 U1.46
  Bottom Layer w10: v1(1524.92,564.92) 1529.92,569.92 1636.13,569.92 1856.13,789.92 1871.13,804.92 1964.92,804.92 2028.92,740.92 2028.92,563.79 2068.29,524.42 2105.42,524.42 v1(2114.92,514.92)
VCAP: C31.2 C32.2 U4.7 | length 230
  Top Layer w20: C32.2 C31.2@556.73,962.36 ; C31.2 C31.2@556.73,962.36 ; C31.2@559.92,962.36 C31.2@556.73,962.36 ; U4.7 594.49,880.35 556.73,918.11 C31.2@556.73,962.36
VDD2V5_1: C14.2 C15.2 C16.2 C19.2 C20.2 C21.2 L2.1 TP1.1 U2.1 U2.12 U2.24 U2.33 | length 2207.9
  Top Layer w9: C21.2 1269.92,769.92 v1(1291.46,748.39) U2.12 ; C14.2@1494.13,348.27 v1(1494.13,384.92) U2.33 ; U2.1 v1(1553.19,799.92) C20.2@1553.19,830.63
  Top Layer w10: C16.2 v1(1229.92,464.92) 1246.65,481.65 U2.24
  Top Layer w15: C14.2 C15.2
  Top Layer w20: v1(1074.92,474.92) L2.1 ; C20.2 C19.2@1659.33,832.36 ; C19.2 TP1.1@1756.77,831.77
  Bottom Layer w20: v1(1074.92,474.92) 1179.92,474.92 1189.92,464.92 v1(1229.92,464.92) 1244.92,464.92 1359.92,349.92 1459.13,349.92 v1(1494.13,384.92) 1494.13,410.71 1469.92,434.92 1469.92,597.92 1496.92,624.92 1611.92,624.92 1677.92,690.92 1677.92,755.92 1654.92,778.92 1596.92,778.92 1575.92,799.92 v1(1553.19,799.92) 1527.19,773.92 1465.92,773.92 1409.92,829.92 1334.92,829.92 1291.46,786.46 v1(1291.46,748.39)
VDD3V3: C27.2 C29.2 C30.2 C33.2 C34.2 C35.2 C36.2 C37.2 C39.2 C40.2 C41.2 C42.2 C45.2 D3.2 ICSP.2 L1.1 LS1.1 POWER.3 POWER.4 R15.1 R17.2 R18.2 R19.2 R22.2 R23.2 R24.2 R34.2 R43.2 S2.2 TP4.1 U1.37 U1.38 U2.3 U2.4 U2.13 U4.10 U4.17 U4.28 U4.40 U4.42 | length 5766.6
  Top Layer w9: C45.2 v1(1499.92,802.92) 1494.13,797.13 U2.4 1494.13,709.92 ccw(c1502.13,709.92) 1502.13,701.92 1505.82,701.92 ccw(c1505.82,709.92) 1513.82,709.92 U2.3
  Top Layer w10: C29.2 v1(1229.92,719.92) 1251.65,698.19 U2.13
  Top Layer w15: R43.2 1320.87,225.95 ; R19.2@1744.45,497.45 R15.1 1785.92,704.92 1837.92,756.92 1837.92,883.92 1773.92,947.92 TP4.1 1773.92,1114.92
  Top Layer w18: v1(226.92,534.92) R34.2 ; C36.2 v1(339.92,639.92) 357.8,622.05 U4.17 ; C27.2@384.92,962.36 C37.2 v1(439.92,934.92) 500,874.84 U4.10 ; C35.2@625.98,326.42 U4.28 ; U4.40 C33.2@920.98,653.54 ; U4.42 v1(889.92,716.54) C41.2@918.98,716.54 ; C41.2@920.39,721.89 R23.2 ; C41.2 C33.2 922.36,628.48 942.92,607.92 942.92,519.92 907.92,484.92 907.92,378.92 C34.2@946.07,340.77
  Top Layer w25: v1(794.92,922.92) R22.2 826.39,950.39 856.92,980.92 856.92,1013.92 957.92,1114.92 ; C40.2 931.92,326.62 C34.2@946.07,340.77
  Top Layer w30: ICSP.2 v1(320.08,870.08) 373.07,923.07 C27.2 ; D3.2@1004.92,269.66 v1@1004.92,303.66 ; C34.2@1004.92,352.92 v1@1004.92,303.66 ; 1384.92,228.83 L1.1 ; S2.2 1582.68,118.11 1472.87,227.92 1384.92,227.92 1168.76,227.92 LS1.1 v1@1004.92,303.66
  Bottom Layer w18: v1(226.92,534.92) 257.92,534.92 339.92,616.92 v1(339.92,639.92) 339.92,656.92 320.08,676.76 v1(320.08,870.08)
  Bottom Layer w25: v1(439.92,934.92) 603.92,934.92 615.92,922.92 v1(794.92,922.92) 794.92,811.54 v1(889.92,716.54) ; v1(625.92,359.92) 906.92,359.92 958.92,307.92 v1(1005.92,307.92) ; v1(1229.92,719.92) 1229.92,788.92 1306.92,865.92 1499.92,865.92 ; v1(1499.92,802.92) 1499.92,865.92 ; v1(1499.92,1113.92) 1499.92,865.92
VDD33_1: C9.2 C10.2 C11.2 C12.2 C13.2 L1.2 U2.9 U2.20 U2.30 U2.48 | length 1576.5
  Top Layer w8: C13.2 v1(1229.92,509.92) 1229.92,539.92 1250.39,560.39 U2.20 ; U2.9 v1(1395.71,794.92) 1395.71,808.15 C10.2 ; C11.2 U2.30 ; U2.48 1633.35,698.19 1645.98,710.83 v1(1645.98,745.98) 1659.92,759.92 C12.2@1682.36,759.92
  Top Layer w20: C9.2 L1.2 ; L1.2@1385.08,347.64 C11.2
  Bottom Layer w20: v1(1229.92,509.92) 1249.92,509.92 1374.92,384.92 v1(1434.92,384.92) 1434.92,614.92 1479.92,659.92 1599.92,659.92 1645.98,705.98 v1(1645.98,745.98) 1444.65,745.98 v1(1395.71,794.92)
WAN_LED1: R4.1 U1.8 | length 1557.3
  Top Layer w10: U1.8 2814.96,180.96 2972.92,338.92 v1(2972.92,447.92) ; v1(4011.92,678.92) R4.1
  Bottom Layer w10: v1(2972.92,447.92) 3203.92,678.92 v1(4011.92,678.92)
WAN_LED2: R33.1 U1.12 | length 1918.8
  Top Layer w10: U1.12 v2(3129.92,488.19) ; v2(4539.37,657.48) 4559.06,677.17 R33.1
  Bottom Layer w10: v2(3129.92,488.19) 3228.35,586.61 4468.5,586.61 v2(4539.37,657.48)
WAN_RX_N: R2.2 T1.8 U1.21 | length 1774.4
  Top Layer w8: U1.21 3602.37,1200.37 3634.74,1232.74 3634.74,1255.72 3667.94,1288.92 3720.72,1288.92 3773.92,1235.72 3773.92,540.72 3830.72,483.92 3994.92,483.92 ; R2.2@3994.92,514.92 3994.92,483.92 ; T1.8 4464.92,381.92 4420.92,425.92 4420.92,448.92 4385.92,483.92 3994.92,483.92
WAN_RX_P: R1.2 T1.6 U1.20 | length 1773.7
  Top Layer w8: U1.20 3681.11,1200.73 3648.74,1233.1 3648.74,1249.92 3673.74,1274.92 3714.92,1274.92 3759.92,1229.92 3759.92,1080.92 3759.92,1072.92 3759.92,1056.92 3751.92,1056.92 3751.92,1040.92 3759.92,1040.92 3759.92,1024.92 3751.92,1024.92 3751.92,1008.92 3759.92,1008.92 3759.92,992.92 3751.92,992.92 3751.92,976.92 3759.92,976.92 3759.92,960.92 3759.92,948.92 3759.92,534.92 3824.92,469.92 3994.92,469.92 ; R1.2@3994.92,440.39 3994.92,469.92 ; T1.6 4364.92,381.92 4406.92,423.92 4406.92,443.12 4380.12,469.92 3994.92,469.92
WAN_TX_N: R6.2 T1.3 U1.23 | length 1774.4
  Top Layer w8: U1.23 3444.89,1165.35 3476.92,1133.32 3476.92,880.92 3476.92,856.92 3453.05,856.92 3453.05,840.92 3476.92,840.92 3476.92,824.92 3453.05,824.92 3453.05,808.92 3476.92,808.92 3476.92,792.92 3453.05,792.92 3453.05,776.92 3476.92,776.92 3476.92,760.92 3453.05,760.92 3453.05,744.92 3476.92,744.92 3476.92,728.92 3453.05,728.92 3453.05,712.92 3476.92,712.92 3476.92,704.92 3476.92,663.12 3885.12,254.92 3934.92,254.92 ; R6.2@3934.92,225.39 3934.92,254.92 ; T1.3 4214.92,344.92 4171.92,301.92 4171.92,286.92 4139.92,254.92 3934.92,254.92
WAN_TX_P: R3.2 T1.1 U1.22 | length 1774.4
  Top Layer w8: U1.22 3523.63,1165.36 3490.92,1132.65 3490.92,1110.92 3490.92,1102.92 3514.61,1102.92 3514.61,1086.92 3490.92,1086.92 3490.92,1070.92 3514.61,1070.92 3514.61,1054.92 3490.92,1054.92 3490.92,1038.92 3514.61,1038.92 3514.61,1022.92 3490.92,1022.92 3490.92,1006.92 3514.61,1006.92 3514.61,990.92 3490.92,990.92 3490.92,974.92 3514.61,974.92 3514.61,958.92 3490.92,958.92 3490.92,942.92 3514.61,942.92 3514.61,926.92 3490.92,926.92 3490.92,903.92 3490.92,668.92 3890.92,268.92 ; 3891.39,268.92 4134.12,268.92 4157.92,292.72 4157.92,302.92 4114.92,345.92 T1.1 ; 3935.39,269.39 R3.2
WANRX_N: J1.6 T1.9 | length 545.5
  Top Layer w8: J1.6 4288.92,1029.08 4288.92,958.72 4309.32,938.32 4314.98,932.66 4331.86,949.54 4343.17,938.23 4326.29,921.35 4337.61,910.04 4354.48,926.92 4365.8,915.6 4348.92,898.72 4350.82,896.82 4421.92,825.72 4421.92,772.92 4464.92,729.92 T1.9
WANRX_P: J1.3 T1.11 | length 545.5
  Top Layer w8: J1.3 4210.08,1139.53 4210.08,1053.71 4233.23,1030.55 4259.29,1030.55 4274.92,1014.92 4274.92,952.92 4407.92,819.92 4407.92,772.92 4364.92,729.92 T1.11
WANTX_N: J1.2 T1.14 | length 545.5
  Top Layer w8: J1.2 4169.29,1025.35 4169.92,1024.72 4169.92,927.92 4169.92,919.92 4190.29,919.92 4190.29,903.92 4169.92,903.92 4169.92,887.92 4190.29,887.92 4190.29,871.92 4169.92,871.92 4169.92,855.92 4190.29,855.92 4190.29,839.92 4169.92,839.92 4169.92,823.92 4190.29,823.92 4190.29,807.92 4169.92,807.92 4169.92,795.92 4169.92,769.92 4216.97,722.87 4216.97,711.97 T1.14@4220.28,708.66
WANTX_P: J1.1 T1.16 | length 545.5
  Top Layer w8: T1.16 4114.92,729.92 4155.92,770.92 4155.92,926.92 4155.92,934.92 4134.12,934.92 4134.12,950.92 4155.92,950.92 4155.92,966.92 4134.12,966.92 4134.12,982.92 4155.92,982.92 4155.92,998.92 4155.92,1006.92 4155.92,1018.92 4129.13,1045.71 J1.1
WIFI_LED: LED.3 U1.15 WIFI.1 | length 2441.8
  Top Layer w10: U1.15 v1@3366.14,548.14 ; v1(4458.92,457.92) 4521.92,394.92 4521.92,249.92 4570.92,200.92 WIFI.1
  Bottom Layer w10: v1(3365.92,547.92) 4368.92,547.92 v1(4458.92,457.92) 4786.92,457.92 4897.18,568.18 LED.3
pads on no net: J1. LS1. M1.0 M2.0 M3.0 M4.0 M5.0 M6.0 T1.4 T1.5 T1.12 T1.13 U1.2 U1.4 U1.5 U1.6 U1.7 U1.9 U1.10 U1.11 U1.24 U1.25 U1.26 U1.27 U1.28 U1.29 U1.30 U1.31 U1.32 U1.33 U1.34 U1.35 U1.49 U4.11 U4.14 U4.15 U4.19 U4.20 U4.26 U4.32 U4.35

## Polygon pours and split planes (outlines as drawn)
GND on Top Layer "GND1" (solid, pour order 11): 0,0 0,1377.95 5078.74,1377.95 5078.74,0
VDD3V3 on Top Layer "GND1" (solid, pour order 7): 2369.92,1310.92 2369.92,1134.92 2139.92,1134.92 2084.92,1079.92 2084.92,1021.92 1884.92,1021.92 1884.92,1067.92 1862.92,1089.92 952.92,1089.92 932.92,1109.92 932.92,1139.92 1756.92,1139.92 1756.92,1232.92 1749.92,1239.92 1749.92,1289.92 1759.92,1299.92 1889.92,1299.92 1894.92,1294.92 1894.92,1241.92 1885.92,1232.92 1885.92,1155.92 1907.92,1133.92 2044.92,1133.92 2129.92,1218.92 2221.92,1310.92 2369.92,1310.92
GND on Bottom Layer "GND1" (solid, pour order 9): 0,1377.95 5078.74,1377.95 5078.74,0 0,0

## Keep-outs
Keep-Out Layer:
  the board outline again, w8

## Other copper
Top Layer:
  rectangle net NetC4_2: 4647.92,375.92 4705.92,632.92
  rectangle net VDD3V3: 970.92,232.92 1036.92,371.92
  rectangle net VDD3V3: 912.92,262.92 970.92,371.92
  pour cut-out: 3904.92,1377.95 3904.92,554.92 4629.92,554.92 4629.92,1377.95
Bottom Layer:
  pour cut-out: 3904.92,1377.95 3904.92,554.92 4629.92,554.92 4629.92,1377.95

## Silkscreen, mask and mechanical layers (free items; w line width, h text height)
Top Overlay:
  circle w6: c4452.02,175.92 r2.24
  circle w6: c4425.26,177.92 r2.24
  lines w6: 4279.26,75.92 4294.26,107.92 4309.26,75.92 ; 4283.48,84.92 4305.04,84.92 ; 4321.26,76.92 4321.26,107.92 4347.26,76.92 4347.26,107.92 ; 4360.26,107.92 4381.26,107.92 ; 4371.26,75.92 4371.26,107.92 ; 4416.26,124.92 4431.26,124.92 ; 4420.26,102.92 4409.26,86.92 4396.26,105.92 4396.26,76.92 4394.26,76.92 4394.26,105.92 4399.26,105.92 4408.26,88.92 4420.26,105.92 4424.26,105.92 4424.26,76.92 4422.26,76.92 4422.26,105.92 ; 4420.26,129.92 4444.26,130.92 4428.26,132.92 ; 4421.47,135.84 cw(c4468.26,153.92) 4422.26,173.92 ; 4432.73,140.59 cw(c4471.26,142.92) 4450.54,175.49 ; 4456.26,105.92 4479.26,76.92 ; 4458.26,105.92 4458.26,76.92 4455.26,76.92 4455.26,105.92 4459.26,105.92 4478.26,81.92 ; 4495.26,77.92 4517.26,77.92 4517.26,76.92 4495.26,76.92 4495.26,105.92 4517.26,105.92 ; 4498.26,77.92 4498.26,105.92 ; 4498.26,91.92 4516.26,91.92 ; 4531.26,87.92 4546.11,87.92 ; 4531.26,88.92 4547.11,88.92 ccw(c4547.11,89.24) 4547.43,89.24 ; 4541.26,87.92 4550.26,76.92 4554.26,76.92 4546.11,85.07 4546.11,87.92 ; 4479.26,76.92 4479.26,105.92 4481.26,105.92 4481.26,76.92 4479.26,76.92 ; 4529.26,105.92 cw(c4529.26,103.92) 4531.26,103.92 4531.26,76.92 4529.26,76.92 4529.26,105.92 ; 4529.26,105.92 4549.26,105.92 cw(c4545.26,97.92) 4547.43,89.24 ; 4546.11,87.92 ccw(c4546.11,89.24) 4547.43,89.24 ; 4413.42,119.89 cw(c4434.26,115.92) 4455.26,118.92 4451.23,119.24 ccw(c4440.26,117.92) 4429.39,119.9 4413.42,119.89 ; 4438.26,76.92 4441.26,76.92 4441.26,105.92 4438.26,105.92 4438.26,76.92
  text "Bitmaintech V1.2 2013/11/29" at 2688.98,1283.46 h40

## Dimensions
0,1377.95 to 0,0 on Mechanical 1
0,1377.95 to 5078.74,1377.95 on Mechanical 1

## Text inside footprints (layer, text, board x,y; h text height)
LS1: Top Overlay "+" at 1075.31,394.21 h39.37 r270; Top Overlay "-" at 1075.31,87.13 h39.37 r270